# Altium PCB Exp 6.PcbDoc
Units mm, origin at the board's own origin, x right, y up, seen from the top; angles counter-clockwise.
Board outline 152.4 x 101.6 mm, 2 copper layers (Top Layer, Bottom Layer); 29 components, 30 nets, 95 pads, 0 vias.
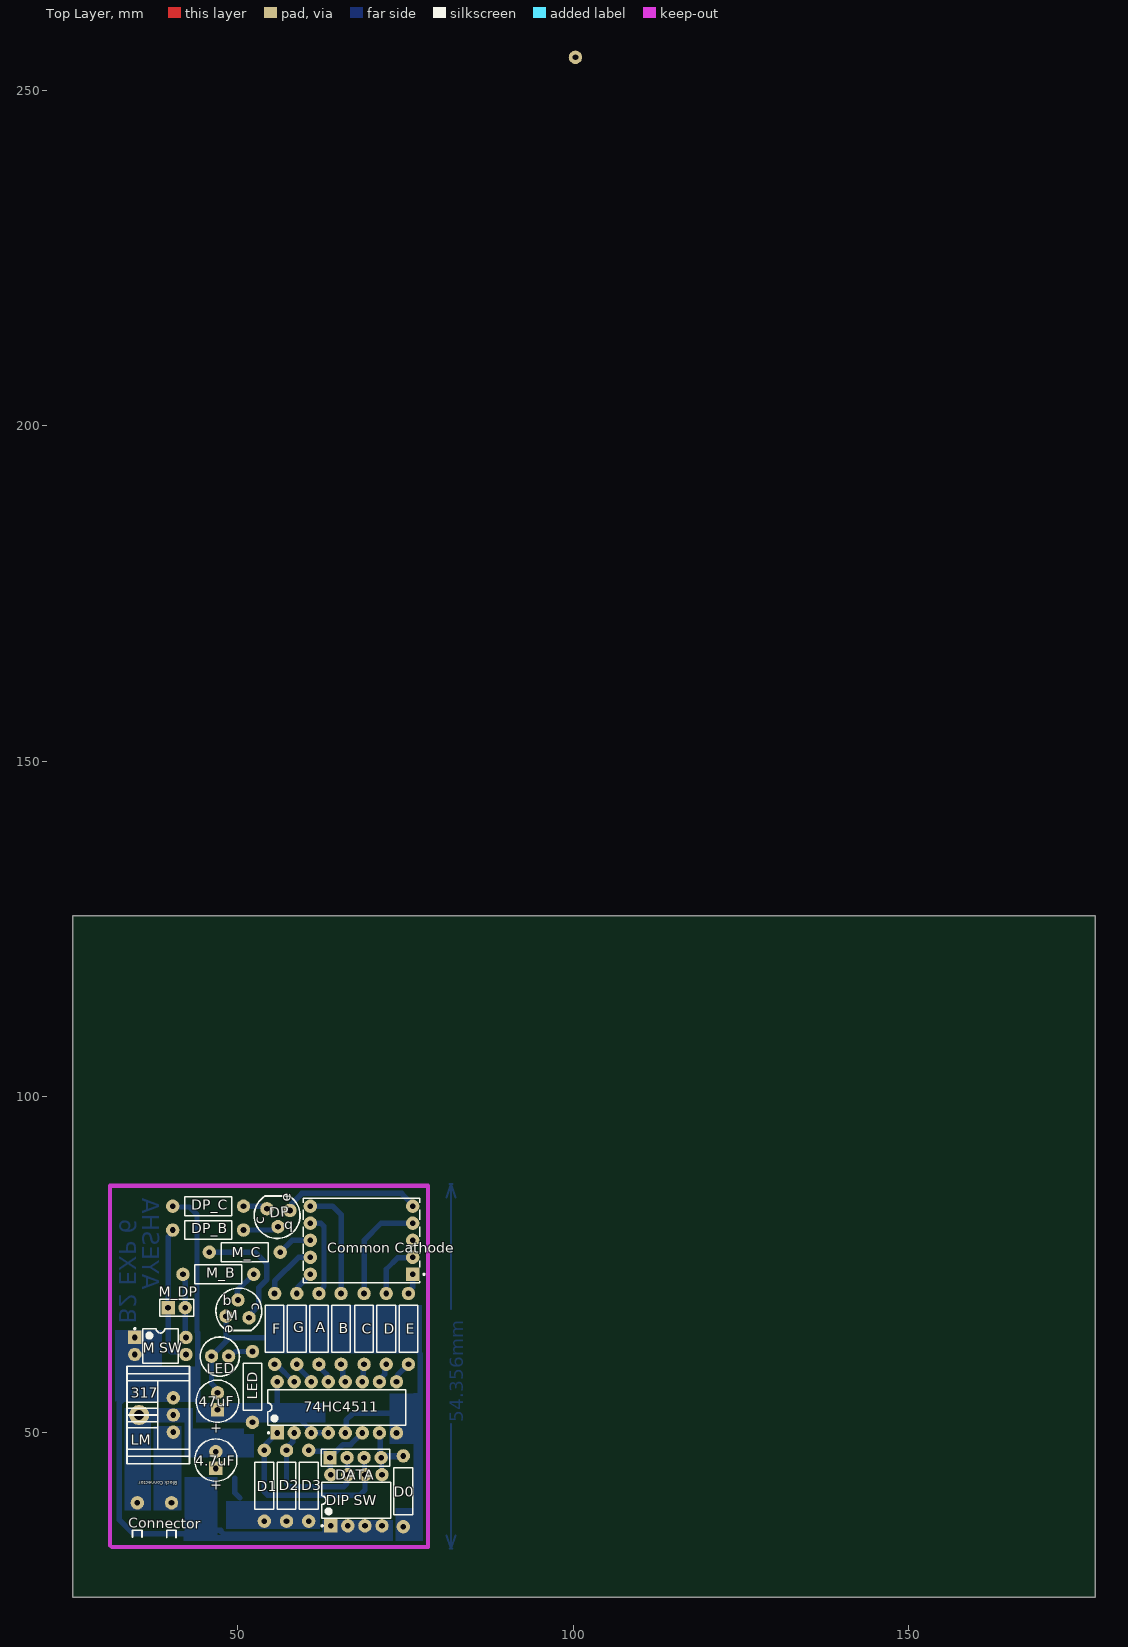
[diagram p0: Top Layer view]
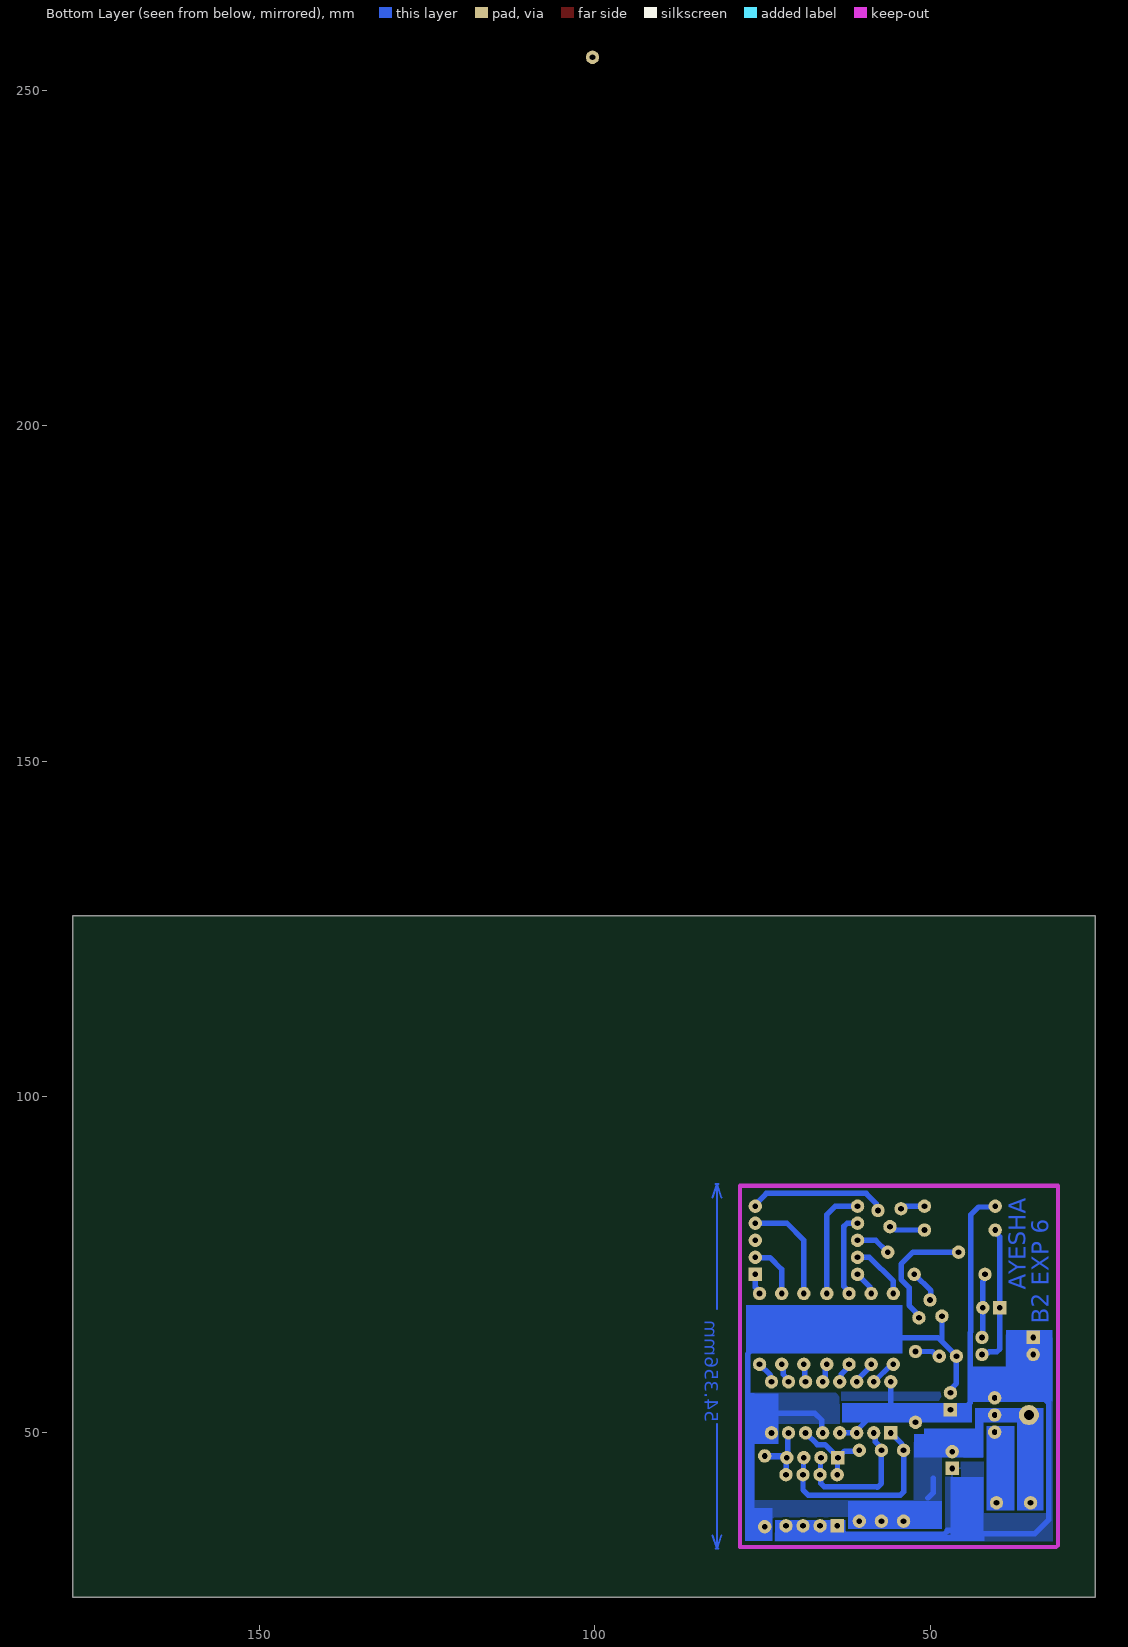
[diagram p1: Bottom Layer view, seen from below]

## Layer stack, top to bottom
Top Solder: solder mask 0.0102, Solder Resist, Dk 3.5
Top Layer: signal copper 0.0356
Dielectric 1: dielectric 0.32, FR-4, Dk 4.8
Bottom Layer: signal copper 0.0356
Bottom Solder: solder mask 0.0102, Solder Resist, Dk 3.5

## Board outline
25.4,25.4 177.8,25.4 177.8,127 25.4,127

## Design rules (kind name [scope] priority, off if disabled: settings)
Clearance [All] p1: gap=0.35 ignorepadtopadclearanceinfootprint=FALSE
PolygonConnect [All] p1: connectstyle=Relief reliefconductorwidth=0.254 reliefentries=4 polygonreliefangle="90 Angle" airgapwidth=0.254
RoutingVias [All] p1: holewidth=0.711 width=1.27 viastyle="Through Hole" minholewidth=0.711 minwidth=1.27 maxholewidth=0.711 maxwidth=1.27
SolderMaskExpansion [All] p1: expansion=0.102 istentingtop=FALSE
Width [All] p1: maxlimit=0.8 minlimit=0.8 preferedwidth=0.8
30 further rules are at their usual default settings.

## Components (designator, comment, footprint, x,y, rotation, side; value= is the part's Value field where it differs from the comment)
4.7uF "Comment" CAPPR2.5-6.3x15 46.736,45.867 r90 top
47uF "Comment" CAPPR2.5-6.3x15 46.99,54.63 r90 top
74HC4511 "Comment" DIP-16 64.77,53.721 r90 top
A "Comment" RES10.55-7X2.8#1 62.103,65.405 r90 top
B "Comment" RES10.55-7X2.8#1 65.405,65.405 r90 top
C "Comment" RES10.55-7X2.8#1 68.834,65.405 r90 top
"Common Cathode" "Comment" LEDDIP-10/14.27RHD 68.453,78.613 r90 top
Connector "Comment" "PCB Block Connector" 37.592,39.243 r180 top
D "Comment" RES10.55-7X2.8#1 72.136,65.405 r90 top
D0 "Comment" RES10.55-7X2.8#1 74.676,41.207 r270 top
D1 "Comment" RES10.55-7X2.8#1 53.975,42.037 r270 top
D2 "Comment" RES10.55-7X2.8#1 57.277,42.037 r90 top
D3 "Comment" RES10.55-7X2.8#1 60.579,42.037 r90 top
DATA "Comment" HDR1X4 63.754,46.228 r0 top
"DIP SW" "Comment" DIP-8 67.691,39.878 r90 top
DP "Comment" "TO-92 Packaging" 56.07,81.978 r90 top
DP_B "Comment" RES10.55-7X2.8#1 45.593,80.137 r180 top
DP_C "Comment" RES10.55-7X2.8#1 45.593,83.693 r180 top
E "Comment" RES10.55-7X2.8#1 75.438,65.405 r90 top
F "Comment" RES10.55-7X2.8#2 55.499,65.405 r90 top
G "Comment" RES10.55-7X2.8#3 58.801,65.405 r90 top
LED "Comment" RES10.55-7X2.8#1 52.197,56.769 r90 top
LED "Comment" LED 47.371,61.341 r270 top
M "Comment" "TO-92 Packaging" 49.974,68.389 r270 top
"M SW" "Comment" DIP-4 38.481,62.865 r0 top
M_B "Comment" RES10.55-7X2.8#1 47.117,73.533 r180 top
M_C "Comment" RES10.55-7X2.8#1 51.054,76.835 r0 top
M_DP "Comment" HDR1X2 39.624,68.58 r0 top
? "Comment" "LM317 with Heat Sink" 40.406,52.578 r90 top

## Footprints (in the part's own frame and the unit in brackets; to place one, negate y for a bottom-side part, rotate by r counter-clockwise, add the part's x,y. Pads: shape width x height; smd on the part's side, far side on the other; paste and mask are expansions set on the pad)
CAPPR2.5-6.3x15 [mm] "Capacitor, Electrolytic, Radial; Body 6.3 x 15 mm (Dia.xH typ); Pin Spacing 2.5 mm (typ)"
  rect 2x2 hole 0.85: 1(-1.25,0)
  round 2 hole 0.85: 2(1.25,0)
  silkscreen extent -3.15,-3.15 3.15,3.15
DIP-4 [mm] "DIP, 4-Pin, Row Spacing 7.62 mm, Pitch 2.54 mm"
  rect 2x2 hole 0.85: 1(-3.81,1.27)
  round 2 hole 0.85: 2(-3.81,-1.27) 3(3.81,-1.27) 4(3.81,1.27)
  silkscreen extent -3.93,-2.55 2.65,2.69, body extent -3.15,-2.5 3.15,2.5, height 4.57
DIP-8 [mm] "DIP, 8-Pin, Row Spacing 7.62 mm, Pitch 2.54 mm"
  rect 2x2 hole 0.85: 1(-3.81,3.81)
  round 2 hole 0.85: 2(-3.81,1.27) 3(-3.81,-1.27) 4(-3.81,-3.81) 5(3.81,-3.81) 6(3.81,-1.27) 7(3.81,1.27) 8(3.81,3.81)
  silkscreen extent -3.93,-5.15 2.65,5.23, body extent -3.6,-5.15 3.6,5.15, height 5.33
DIP-16 [mm] "DIP; 16 Leads; Row Spacing 7.62 mm; Pitch 2.54 mm"
  rect 2x2 hole 0.85: 1(-3.81,8.89)
  round 2 hole 0.85: 2(-3.81,6.35) 3(-3.81,3.81) 4(-3.81,1.27) 5(-3.81,-1.27) 6(-3.81,-3.81) 7(-3.81,-6.35) 8(-3.81,-8.89) 9(3.81,-8.89) 10(3.81,-6.35) 11(3.81,-3.81) 12(3.81,-1.27) 13(3.81,1.27) 14(3.81,3.81) 15(3.81,6.35) 16(3.81,8.89)
  silkscreen extent -3.93,-10.3 2.65,10.31, body extent -3.6,-10.28 3.6,10.28, height 5.08
HDR1X2 [mm] "Connector; Header; 2 Position"
  rect 2x2 hole 0.85: 1(0,0)
  round 2 hole 0.85: 2(2.54,0)
  silkscreen extent -1.27,-1.27 3.81,1.27
HDR1X4 [mm] "Connector; Header; 4 Position"
  rect 2x2 hole 0.85: 1(0,0)
  round 2 hole 0.85: 2(2.54,0) 3(5.08,0) 4(7.62,0)
  silkscreen extent -1.27,-1.27 8.89,1.27
LED [mm]
  round 2 hole 0.85: 1(0,1.27) 2(0,-1.27)
  silkscreen extent -2.86,-2.95 2.97,2.89
LEDDIP-10/14.27RHD [mm] "LED, 7-Segment Display, 14.27 mm, RHD; 10 Leads; Row Space 15.24 mm; Pitch 2.54 mm"
  rect 2x2 hole 0.85: 1(-5.08,-7.62)
  round 2 hole 0.85: 2(-2.54,-7.62) 3(0,-7.62) 4(2.54,-7.62) 5(5.08,-7.62) 6(5.08,7.62) 7(2.54,7.62) 8(0,7.62) 9(-2.54,7.62) 10(-5.08,7.62)
  silkscreen extent -6.3,-9.43 6.3,8.65, body extent -6.3,-8.65 6.3,8.65, height 8.3
"LM317 with Heat Sink" [mm]
  round 2 hole 0.7 slot 0.8 at 0 deg: adj(-2.55,0) in(2.55,0) out(0,0)
  round 3 hole 1.5: out(0,5.1)
  silkscreen extent -7.25,-2.4 7.25,6.9
"PCB Block Connector" [mm]
  round 2 hole 0.85: 1(-2.54,-0.254) 2(2.54,-0.24)
  silkscreen extent -3.22,3.82 3.25,4.96, body extent -5,-5.45 5.03,4.96, height 5.08
RES10.55-7X2.8#1 [mm] "Resistor, Axial; Body 7 x 2.8 mm (LxDia. max), Lead Dia. 0.65 mm (max)"
  round 2 hole 0.85: 1(-5.275,0) 2(5.275,0)
  silkscreen extent -3.5,-1.4 3.5,1.4
RES10.55-7X2.8#2 [mm] "Resistor, Axial; Body 7 x 2.8 mm (LxDia. max), Lead Dia. 0.65 mm (max)"
  round 2 hole 0.85: ""(-5.275,0) ""(5.275,0)
  silkscreen extent -3.5,-1.4 3.5,1.4
RES10.55-7X2.8#3 [mm] "Resistor, Axial; Body 7 x 2.8 mm (LxDia. max), Lead Dia. 0.65 mm (max)"
  round 2 hole 0.85: 1(-5.275,0) ""(5.275,0)
  silkscreen extent -3.5,-1.4 3.5,1.4
"TO-92 Packaging" [mm] "for 2N3904"
  round 2 hole 0.85: T(-1.333,0.063) T(1.08,-1.714) T(1.333,1.714)
  silkscreen extent -3.1,-3.23 3.22,3.61

## Free pads (board coordinates)
  round 2 hole 0.85: 2(100.33,254.889)

## Nets (pads, with @x,y where several pads share a name; then routed paths per layer and width w, separated by ;. In a path a pad name is that pad's centre, name@x,y a point inside that pad or via, vN(x,y) a via of type N, cw(c..) or ccw(c..) an arc to the next point about the centre after c; other vN are vias at no path point)
A: "Common Cathode.7" A.2 | length 12.5
  Bottom Layer w0.8: 60.833,81.153 62.396,81.153 62.865,80.684 62.865,71.749 62.103,70.987 A.2
a_: 74HC4511.13 A.1 | length 3.2
  Bottom Layer w0.8: A.1 62.103,59.805 63.27,58.638 63.27,57.761 74HC4511.13
B: "Common Cathode.6" B.2 | length 16.8
  Bottom Layer w0.8: 60.833,83.693 64.135,83.693 65.405,82.423 B.2
b_: 74HC4511.12 B.1 | length 2.9
  Bottom Layer w0.8: B.1 65.635,59.9 65.635,58.261 66.04,57.856 74HC4511.12
C: "Common Cathode.4" C.2 | length 16.2
  Bottom Layer w0.8: C.2 68.834,78.613 71.374,81.153 76.073,81.153
c_: 74HC4511.11 C.1 | length 2.7
  Bottom Layer w0.8: 74HC4511.11 68.707,57.658 68.707,60.003 C.1
COM: "Common Cathode.8" M_C.2 | length 5.2
  Bottom Layer w0.8: M_C.2 56.343,76.835 58.121,78.613 60.833,78.613
D: "Common Cathode.2" D.2 | length 8.3
  Bottom Layer w0.8: D.2 72.136,74.295 73.873,76.032 76.032,76.032 76.073,76.073
D0: 74HC4511.7 "DIP SW.5" D0.1 DATA.4 | length 13.1
  Bottom Layer w0.8: 74HC4511.7 71.247,49.784 71.247,46.355 DATA.4 ; DATA.4@71.374,46.482 D0.1 74.549,46.355 71.501,46.355 DATA.4 ; 71.501,43.688 71.438,43.752 71.438,46.164 DATA.4
D1: 74HC4511.1 "DIP SW.6" D1.1 DATA.3 | length 29.9
  Bottom Layer w0.8: 74HC4511.1 54.205,48.236 54.205,47.542 D1.1 53.975,41.109 54.444,40.64 68.199,40.64 68.961,41.402 68.961,43.688 68.897,43.752 DATA.3@68.897,46.164
D2: 74HC4511.2 "DIP SW.7" D2.2 DATA.2 | length 21.4
  Bottom Layer w0.8: 74HC4511.2 58.19,49.681 58.19,48.55 57.277,47.637 D2.2 57.277,42.386 57.873,41.79 57.993,41.91 65.825,41.91 66.294,42.379 66.294,43.561 66.421,43.688 66.358,43.752 DATA.2@66.358,46.164
D3: 74HC4511.6 "DIP SW.8" D3.2 DATA.1 | length 12.5
  Bottom Layer w0.8: D3.2 60.688,47.203 62.779,47.203 DATA.1 DATA.1@63.817,46.291 ; 63.817,43.752 DATA.1@63.817,46.291 ; 74HC4511.6 66.83,48.161 65.687,48.161 DATA.1@63.817,46.291
d_: 74HC4511.10 D.1 | length 3
  Bottom Layer w0.8: 74HC4511.10 71.12,57.856 71.906,58.642 71.906,59.9 D.1
DP: "Common Cathode.5" DP.T@57.785,83.058 | length 20.6
  Bottom Layer w0.8: DP.T@57.697,83.224 58.015,83.542 58.015,84.05 59.563,85.598 74.422,85.598 76.073,83.947 76.073,83.693
DP_B: DP.T@56.007,80.645 DP_B.1 | length 5
  Bottom Layer w0.8: DP_B.1 55.174,80.137 DP.T@55.682,80.645
DP_C: DP.T@54.356,83.312 DP_C.1 | length 3.6
  Bottom Layer w0.8: DP_C.1 53.65,83.693 54.031,83.312 DP.T@54.356,83.312
DP_SW: "M SW.3" DP_B.2 M_DP.1 | length 21
  Bottom Layer w0.8: DP_B.2 40.318,79.812 39.624,79.118 39.624,62.445 40.093,61.976 41.222,61.976 41.374,61.825 42.061,61.825 42.291,61.595
E: "Common Cathode.1" E.2 | length 3.1
  Bottom Layer w0.8: E.2 75.438,71.005 76.073,71.64 76.073,73.533
e_: 74HC4511.9 E.1 | length 3.3
  Bottom Layer w0.8: 74HC4511.9 73.819,57.69 73.819,58.511 E.1
F: "Common Cathode.9" F.@55.499,70.68 | length 8.6
  Bottom Layer w0.8: F.@55.499,70.68 55.506,70.687 55.506,72.524 59.055,76.073 60.833,76.073
f_: 74HC4511.15 F.@55.499,60.13 | length 4
  Bottom Layer w0.8: F.@55.499,60.13 55.756,60.13 58.355,57.531 74HC4511.15
G: "Common Cathode.10" G. | length 3.7
  Bottom Layer w0.8: G. 59.031,70.91 59.031,71.731 60.833,73.533
g_: 74HC4511.14 G.1 | length 3.8
  Bottom Layer w0.8: G.1 58.801,59.91 60.96,57.751 74HC4511.14 ; 74HC4511.14@61.165,57.736 61.341,57.56 74HC4511.14@61.341,57.531
GND: 4.7uF.2 47uF.2 74HC4511.5 74HC4511.8 ?.out Connector.2 D0.2 D1.2 D2.1 D3.1 LED.2@46.101,61.341 M.T@48.26,67.31 | length 113.3
  Bottom Layer w0.8: 33.74,46.847 33.74,47.149 ; 33.921,47.349 33.921,47.025 34.09,46.856 ; 34.09,47.132 34.09,46.856 ; 34.099,46.847 34.09,46.856 ; ?.out@35.306,52.578 35.536,52.348 40.384,52.348 ?.out@40.406,52.326 ; ?.out@40.406,52.578 40.594,52.39 42.457,52.39 42.926,51.921 42.926,50.419 43.307,50.038 46.14,50.038 46.609,49.569 46.609,47.244 4.7uF.2 ; 47uF.2 46.863,56.007 46.863,56.515 46.101,57.277 46.101,61.341 48.26,63.5 ; M.T@48.26,67.31 48.26,63.5 ; 49.574,43.127 49.574,40.98 50.351,40.203 ; D3.1 60.706,36.889 60.706,38.862 ; 74HC4511.5 66.167,50.038 66.167,51.816 67.183,52.832 73.146,52.832 73.66,52.318 74HC4511.8 ; 76.835,37.846 76.835,49.676 76.6,49.911 74HC4511.8 ; 76.898,46.545 76.898,49.378 77.197,49.676 77.216,49.676 77.216,61.653 74.756,64.114 48.874,64.114 48.26,63.5 ; 77.178,53.429 74HC4511.8
Input: ?.adj Connector.1
LED_R: LED.1@48.641,61.341 LED.2@52.197,62.044 | length 3.8
  Bottom Layer w0.8: LED.1@48.641,61.341 48.966,61.341 49.669,62.044 LED.2@52.197,62.044
M_B: M.T@50.038,69.723 M_B.1 | length 4.9
  Bottom Layer w0.8: M.T@50.038,69.723 49.911,69.85 49.911,71.12 52.324,73.533 M_B.1
M_C: M.T@51.689,67.056 M_C.1 | length 18.4
  Bottom Layer w0.8: M_C.1 52.578,76.835 54.349,75.064 54.349,72.764 53.147,71.562 53.147,68.895 52.254,68.002 52.254,67.946 51.689,67.381 M.T@51.689,67.056
M_SW: "M SW.4" M_B.2 M_DP.2 | length 9.6
  Bottom Layer w0.8: M_B.2 42.072,73.303 42.072,72.557 42.164,72.464 42.164,64.262 42.291,64.135
VCC: 4.7uF.1 47uF.1 74HC4511.3 74HC4511.4 74HC4511.16 "DIP SW.1" "DIP SW.2" "DIP SW.3" "DIP SW.4" "M SW.1" "M SW.2" ?.in DP_C.2 LED.1@52.197,51.494 | length 123.5
  Bottom Layer w0.8: DP_C.2 40.445,83.566 42.799,83.566 43.942,82.423 43.942,64.959 44.041,64.86 44.041,54.425 44.51,53.956 46.414,53.956 47uF.1 50.863,53.38 51.919,52.324 51.967,52.276 51.967,51.724 LED.1@52.197,51.494 ; ?.in 33.157,55.128 32.359,54.33 32.359,36.957 34.41,34.906 44.516,34.906 ; 44.516,38.544 44.516,37.49 46.59,35.416 47.51,35.416 47.51,35.249 47.949,34.81 62.623,34.81 63.881,36.068 ; 74HC4511.16 55.88,53.975 57.213,53.975 60.96,50.228 74HC4511.3 74HC4511.4 ; 64.008,36.195 71.628,36.195
pads on no net: "Common Cathode.3"
copper on no net: | length 46.7
  Bottom Layer w0.254: 81.121,34.639 81.788,32.639 ; 81.121,84.995 81.788,86.995 ; 81.534,32.639 82.042,32.639 ; 81.534,86.995 82.042,86.995 ; 81.788,51.265 81.788,32.639 ; 81.788,68.369 81.788,86.995 ; 82.455,34.639 81.788,32.639 ; 82.455,84.995 81.788,86.995

## Polygon pours and split planes (outlines as drawn)
VCC on Bottom Layer "VCC_L02_P005" (solid, pour order 5): 73.152,35.052 47.752,35.052 47.752,45.593 42.037,45.593 42.037,37.973 36.957,37.973 32.512,37.973 32.512,54.737 63.246,54.737 63.246,56.007 48.514,56.007 48.133,54.483 45.593,54.251 44.958,56.007 38.481,56.007 38.608,55.88 38.735,56.007 38.735,64.516 32.004,64.516 32.004,64.897 31.75,64.643 31.75,33.782 73.152,33.782
GND on Bottom Layer "GND_L02_P003" (solid, pour order 3): 48.26,37.211 77.597,37.211 77.597,55.88 63.5,55.88 63.5,51.308 76.2,51.308 76.2,39.878 70.993,39.878 61.595,39.878 52.451,39.878 52.451,48.52 42.164,48.52 42.164,46.228 48.26,46.228
no net on Bottom Layer "NONET_L02_P001" (hatched Horizontal grid 0.508 track 0.203, pour order 1): 50.165,34.798

## Keep-outs
Keep-Out Layer:
  lines w0.254: 30.988,33.147 31.242,32.893
  lines w0.6: 30.988,33.147 30.988,86.741 78.359,86.741 78.359,32.893 31.242,32.893

## Other copper
Bottom Layer:
  rectangle net GND: 42.037,46.228 43.307,53.594
  rectangle net GND: 33.147,51.435 43.307,53.594
  rectangle net VCC: 32.512,54.483 44.069,59.817
  rectangle net GND: 72.644,48.26 77.47,55.753
  rectangle net GND: 73.533,33.782 77.597,38.735
  rectangle net VCC: 62.611,34.544 73.152,36.957
  rectangle net VCC: 42.042,33.782 46.99,43.307
  rectangle net GND: 42.164,48.641 50.927,50.546
  rectangle net GND: 48.26,35.56 62.23,39.751
  rectangle net VCC: 31.75,54.61 38.735,65.278
  rectangle net VCC: 43.815,51.435 63.119,54.356
  rectangle net GND: 54.102,61.722 77.47,68.961
  rectangle net VCC: 41.91,33.782 73.152,34.666
  rectangle net GND: 76.2,37.211 77.597,55.88
  rectangle net GND: 42.164,46.228 52.451,49.784
  rectangle net GND: 33.147,38.354 37.084,53.594
  rectangle net Input: 37.465,38.354 41.656,50.927
  text "AYESHA" at 35.806,71.239 h2.5 r270
  text "B2 EXP 6" at 32.377,66.159 h2.5 r270
  text "54.356mm" at 83.588,51.519 h2 r90

## Dimensions
30.607,90.805 to 78.719,90.932 on Bottom Layer

## Text inside footprints (layer, text, board x,y; h text height)
4.7uF: Top Overlay "+" at 47.486,41.242 h1.5 r90
47uF: Top Overlay "+" at 47.498,49.677 h1.5 r90
Connector: Top Overlay "Block Connector" at 41.021,42.672 h0.51 r180
DP: Top Overlay "c" at 53.975,81.026 h1.5 r90; Top Overlay "e" at 57.912,84.328 h1.5 r90; Top Overlay "b" at 58.293,81.407 h1.52 r180
M: Top Overlay "c" at 52.07,69.342 h1.5 r270; Top Overlay "e" at 48.133,66.04 h1.5 r270; Top Overlay "b" at 47.752,68.961 h1.52
?: Top Overlay "317" at 34.036,55.118 h1.52; Top Overlay "LM" at 34.085,48.177 h1.52